# Altium PCB Driver_Board2.28.PcbDoc
Units mil, origin at the board's own origin, x right, y up, seen from the top; angles counter-clockwise.
Board outline 3117.08 x 1370.17 mil, 2 copper layers (Top Layer, Bottom Layer); 45 components, 37 nets, 213 pads, 102 vias.
Unrouted connection lines stored in the file: 17.
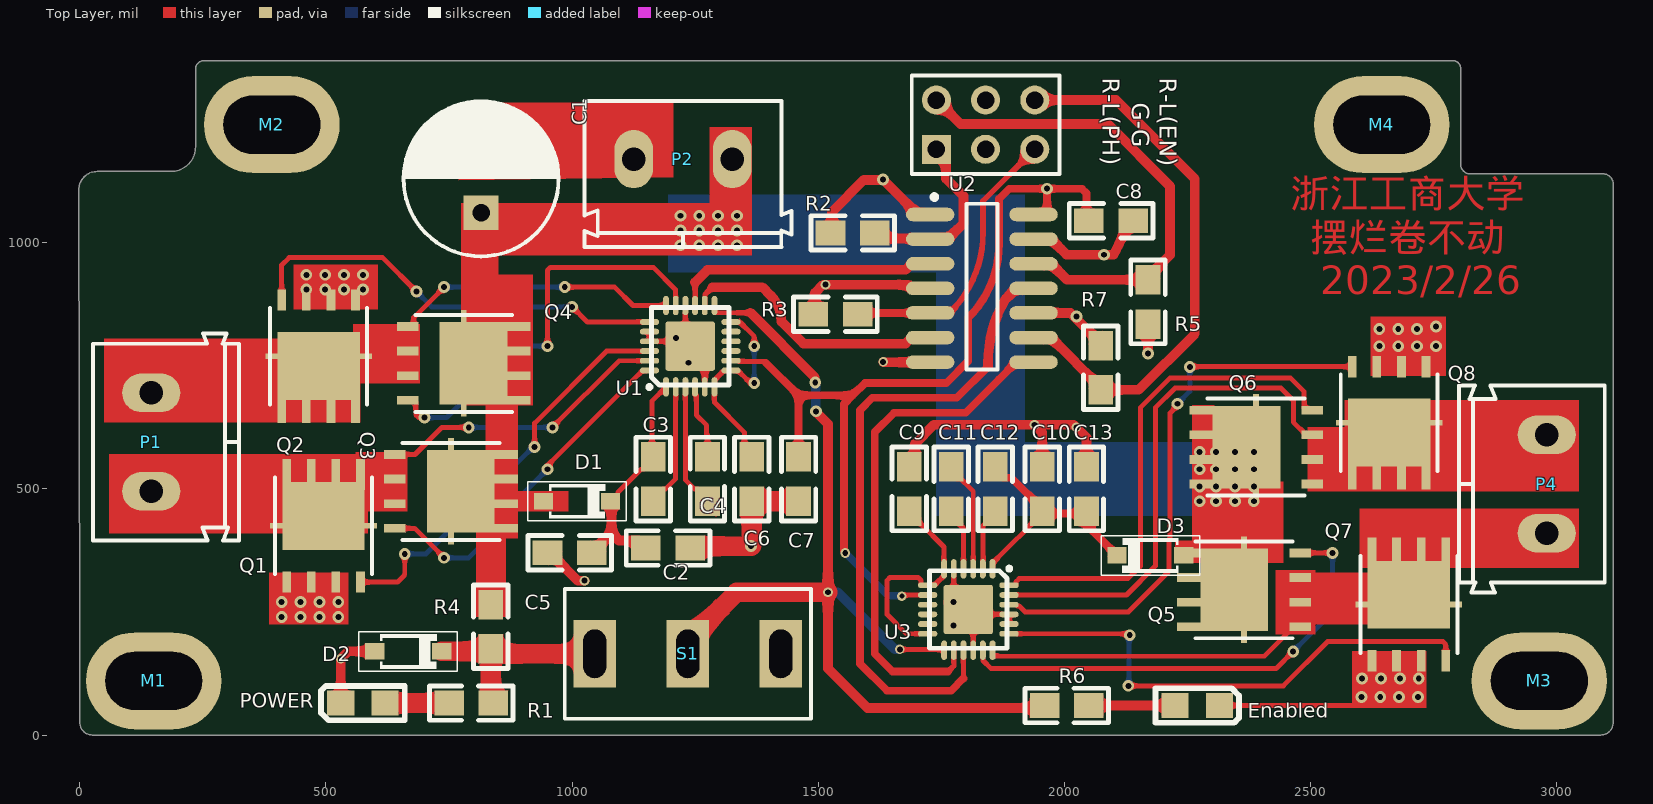
[diagram p0: Top Layer view]
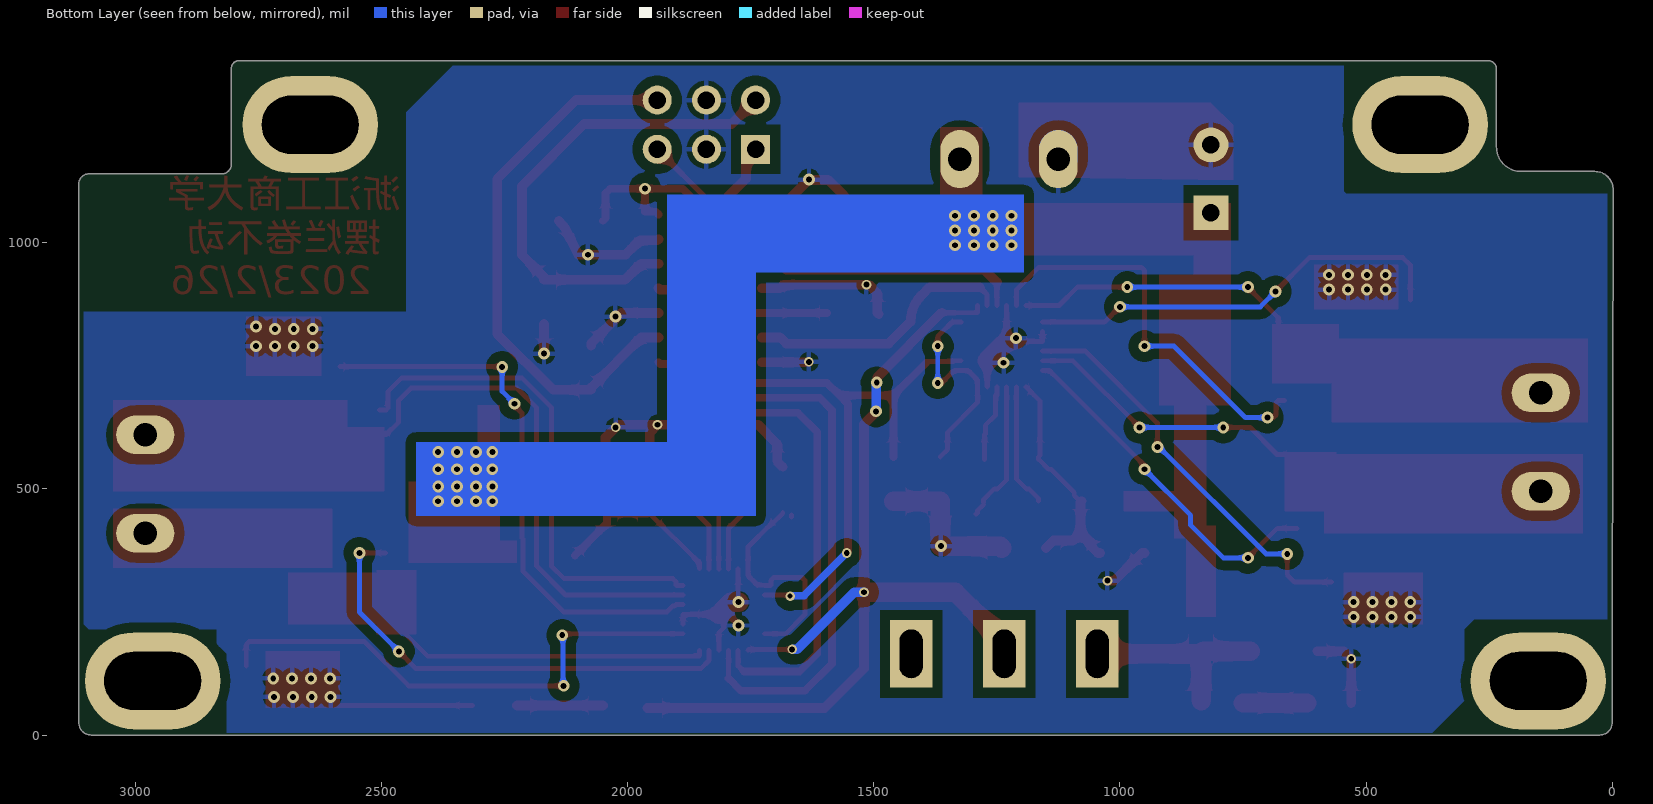
[diagram p1: Bottom Layer view, seen from below]

## Layer stack, top to bottom
Top Solder: solder mask 0.4, Solder Resist, Dk 3.5
Top Layer: signal copper 1.4
Dielectric 1: dielectric 12.6, FR-4, Dk 4.8
Bottom Layer: signal copper 1.4
Bottom Solder: solder mask 0.4, Solder Resist, Dk 3.5

## Board outline
0,25 0,205 -2.08,1107.92 cw(c35,1107.92) 35,1145 185,1145 ccw(c185,1195) 235,1195 235,1355 cw(c252.5,1352.5) 255,1370 2790,1370 cw(c2790,1355) 2805,1355 2805,1160 ccw(c2825,1160) 2825,1140 3095,1140 cw(c3095,1120) 3115,1120 3115,25 cw(c3090,25) 3090,0 25,0 cw(c25,25)

## Design rules (kind name [scope] priority, off if disabled: settings)
Clearance [All] p1: gap=6 ignorepadtopadclearanceinfootprint=TRUE
PolygonConnect [All] p1: connectstyle=Relief reliefconductorwidth=10 reliefentries=4 polygonreliefangle="90 Angle" airgapwidth=10
RoutingVias [All] p1: holewidth=11.81 width=19.68 viastyle="Through Hole" minholewidth=7.87 minwidth=9.84 maxholewidth=19.68 maxwidth=39.37
SolderMaskExpansion [All] p1: expansion=4 istentingtop=FALSE
Width [All] p1: maxlimit=196.85 minlimit=10 preferedwidth=19.68 minimp=50.000000 maximp=50.000000 favimp=50.000000
30 further rules are at their usual default settings.

## Components (designator, comment, footprint, x,y, rotation, side; value= is the part's Value field where it differs from the comment)
C1 "Comment" CAPPR3.5-8X11.5 815,1130 r90 top value=220uF
C2 "Comment" 0805 1150,380 r0 top value=100nF
C3 "Comment" 0805 1165,475 r90 top value=1uF
C4 "Comment" 0805 1275,565 r270 top value=100nF
C5 "Comment" 0805 1040,370 r180 top value=10uF
C6 "Comment" 0805 1365,475 r90 top value=1uF
C7 "Comment" 0805 1460,475 r90 top value=1uF
C8 "Comment" 0805 2140,1045 r180 top value=1uF
C9 "Comment" 0805 1685,545 r270 top value=1uF
C10 "Comment" 0805 1955,455 r90 top value=10uF
C11 "Comment" 0805 1770,455 r90 top value=100nF
C12 "Comment" 0805 1860,455 r90 top value=1uF
C13 "Comment" 0805 2045,455 r90 top value=100nF
D1 "Comment" SOD-123-L 1010,475 r0 top
D2 "Comment" SOD-123-L 667,170 r0 top
D3 "Comment" SOD-123-L 2175,365 r180 top
Enabled "Comment" 0805LED 2225,60 r0 top (schematic designator LED2)
M1 "MountHole" M3-MountSlot 132.83,87.2 r0 top
M2 "MountHole" M3-MountSlot 372.83,1217.2 r0 top
M3 "MountHole" M3-MountSlot 2947.83,87.2 r0 top
M4 "MountHole" M3-MountSlot 2627.83,1217.2 r0 top
P1 "KF/WJ/DG 30x connecter" "KF/WJ/DG 301-2p-5.0mm"#1 145,595 r270 top
P2 "KF/WJ/DG 30x connecter" "KF/WJ/DG 301-2p-5.0mm"#2 1225,1170 r180 top
P3 "Comment" HDR2X3 1740,1190 r0 top
P4 "KF/WJ/DG 30x connecter" "KF/WJ/DG 301-2p-5.0mm"#3 2980,510 r90 top
POWER "Comment" 0805led 620,65 r180 top (schematic designator LED1)
Q1 "Comment" DFN5x6 495,425 r0 top
Q2 "Comment" DFN5x6 485,769.69 r180 top
Q3 "Comment" DFN5x6 754.17,495 r270 top
Q4 "Comment" DFN5x6 780,755 r270 top
Q5 "Comment" DFN5x6 2365,295 r90 top
Q6 "Comment" DFN5x6 2389.68,585 r90 top
Q7 "Comment" DFN5x6 2700,265.32 r0 top
Q8 "Comment" DFN5x6 2660,634.33 r180 top
R1 "Comment" 0805 750,65 r0 top value=1K
R2 "Comment" 0805 1615,1020 r180 top value=10K
R3 "Comment" 0805 1580,855 r180 top value=10K
R4 "Comment" 0805 835,265 r270 top value=2.2K
R5 "Comment" 0805 2170,835 r90 top value=10K
R6 "Comment" 0805 1960,60 r0 top value=330R
R7 "Comment" 0805 2073.8,791.2 r270 top value=10K
S1 "Comment" SS12D10 1235,165 r180 top
U1 "Comment" QFN24-4x4 1240,790 r90 top
U2 "Comment" SOP14 1832.5,882.5 r0 top
U3 "Comment" QFN24-4x4 1805,255 r270 top

## Footprints (in the part's own frame and the unit in brackets; to place one, negate y for a bottom-side part, rotate by r counter-clockwise, add the part's x,y. Pads: shape width x height; smd on the part's side, far side on the other; paste and mask are expansions set on the pad)
0805 [mil]
  rect 60x50 smd: 1(0,0) 2(90,0)
  silkscreen extent -40,-35 130,35
0805LED [mil]
  rect 55x50 smd: A(0,0) C(90,0)
  silkscreen extent -40,-35 130,35
0805led [mil]
  rect 55x50 smd: A(0,0) C(90,0)
  silkscreen extent -40,-35 130,35
CAPPR3.5-8X11.5 [mm]
  rect 1.8x1.8 hole 0.9: 1(-1.75,0)
  round 1.8 hole 0.9: 2(1.75,0)
  silkscreen extent -4,-4.01 4,4, body extent -4,-3.98 4,3.98, height 11.5
DFN5x6 [mm]
  rect 0.45x1.6 smd: 1(-1.905,2.65) 1(-0.635,2.65) 1(0.635,2.65) 1(1.905,2.65)
  rect 5.5x0.3 smd: 1(0,0)
  rect 4.25x3.5 smd: 1(0,0.5)
  rect 0.45x1.1 smd: 2(1.905,-2.9) 3(-1.905,-2.9) 3(-0.635,-2.9) 3(0.635,-2.9)
  silkscreen extent -2.5,-2.5 2.5,2.5, body extent -2.45,-3 2.45,3, height 1
HDR2X3 [mm]
  rect 1.5x1.5 hole 0.9: 1(0,0)
  round 1.5 hole 0.9: 2(0,2.54) 3(2.54,0) 4(2.54,2.54) 5(5.08,0) 6(5.08,2.54)
  silkscreen extent -1.27,-1.27 6.35,3.81, body extent -1.27,-1.27 6.35,3.81, height 8.54
"KF/WJ/DG 301-2p-5.0mm"#1 [mm]
  oval 2x3 hole 1.2: 1(-2.544,0) 2(2.536,0)
  silkscreen extent -5.6,-3 5.08,4.53, body extent -5.6,-3 5,4.6, height 10
"KF/WJ/DG 301-2p-5.0mm"#2 [mm]
  oval 2x3 hole 1.2: 1(2.536,0) 2(-2.544,0)
  silkscreen extent -5.6,-3 5.08,4.53, body extent -5.6,-3 5,4.6, height 10
"KF/WJ/DG 301-2p-5.0mm"#3 [mm]
  oval 2x3 hole 1.2: 1(2.54,0) 2(-2.54,0)
  silkscreen extent -5.6,-3 5.08,4.53, body extent -5.6,-3 5,4.6, height 10
M3-MountSlot [mm]
  oval 7x5 hole 3 slot 5 at 0 deg: 1(0.436,0.579)
QFN24-4x4 [mm]
  rrect10% 2.55x2.55 smd: 0(0,0)
  oval 1x0.3 smd: 1(-2.1,1.25) 2(-2.1,0.75) 3(-2.1,0.25) 4(-2.1,-0.25) 5(-2.1,-0.75) 6(-2.1,-1.25) 13(2.1,-1.25) 14(2.1,-0.75) 15(2.1,-0.25) 16(2.1,0.25) 17(2.1,0.75) 18(2.1,1.25)
  oval 0.3x1 smd: 7(-1.25,-2.1) 8(-0.75,-2.1) 9(-0.25,-2.1) 10(0.25,-2.1) 11(0.75,-2.1) 12(1.25,-2.1) 19(1.25,2.1) 20(0.75,2.1) 21(0.25,2.1) 22(-0.25,2.1) 23(-0.75,2.1) 24(-1.25,2.1)
  silkscreen extent -2.21,-2 2,2.21, body extent -2,-2 2,2, height 0.9
SOD-123-L [mm]
  rect 1x0.85 smd: A(-1.727,0) K(1.727,0)
  silkscreen extent -2.54,-1.02 2.54,1.02, body extent -1.85,-0.8 1.85,0.8, height 1.2
SOP14 [mm] "SOIC, 16-Leads, Body 9.9x3.9mm, Pitch 1.27mm, IPC Low Density"
  oval 2.5x0.7 smd: 1(-2.667,4.445) 2(-2.667,3.175) 3(-2.667,1.905) 4(-2.667,0.635) 5(-2.667,-0.635) 6(-2.667,-1.905) 7(-2.667,-3.175) 8(2.667,-3.175) 9(2.667,-1.905) 10(2.667,-0.635) 11(2.667,0.635) 12(2.667,1.905) 13(2.667,3.175) 14(2.667,4.445)
  silkscreen extent -2.57,-3.56 0.8,5.47, body extent -2,-5 2,5, height 1.75
SS12D10 [mm]
  rect 2.2x3.5 hole 1.2 slot 2.5 at 90 deg mask+0.07: 1(-4.8,0) 2(0,0) 3(4.8,0)
  silkscreen extent -6.35,-3.35 6.35,3.35, body extent -6.4,-3.3 6.35,3.8, height 12.5

## Part data
C1: library part Cap-Elect, "Polarized Capacitor (Radial)", Voltage=25V, Price(RMB)=0.000, Published=8-Jun-2000, Publisher="Altium Limited", Revision="July-2002: Re-released for DXP Platform."
C2 C4 C11 C13: library part Cap-Chip_1, "贴片电容", Tolerance=±10%, Voltage=50V, Price(RMB)=0.000, Published=8-Jun-2000, Publisher="Altium Limited", Revision="July-2002: Re-released for DXP Platform."
C3 C6 C7 C8 C9 C12: library part Cap-Chip_2, "贴片电容", Tolerance=±10%, Voltage=25V, Price(RMB)=0.000, Published=8-Jun-2000, Publisher="Altium Limited", Revision="July-2002: Re-released for DXP Platform."
C5 C10: library part Cap-Chip, "贴片电容", Tolerance=±10%, Voltage=25V, Price(RMB)=0.000, Published=8-Jun-2000, Publisher="Altium Limited", Revision="July-2002: Re-released for DXP Platform."
D1 D3: library part "Diode Schottky", "肖特基二极管 Diode", PartNumber=1N5819, Imax=500mA, Price(RMB)=0.000, Published=8-Jun-2000, Publisher="Altium Limited", Revision="July-2002: Re-released for DXP Platform."
D2: library part "Diode Zen", "3.3V稳压二极管 SOD-123", Price(RMB)=0.000, Published=8-Jun-2000, Publisher="Altium Limited", Revision="July-2002: Re-released for DXP Platform."
Enabled: library part "LED Chip Blue", "Typical Chip LED", Color=Blue, Price(RMB)=0.00, Published=8-Jun-2000, Publisher="Altium Limited", Revision="July-2002: Re-released for DXP Platform."
M1 M2 M3 M4: "固定孔"
P1 P2 P4: library part "KF/WJ/DG 30x", "接线端子 2Pin"
P3: library part "Header 3X2", "Header, 3-Pin, Dual row", LatestRevisionDate=17-Jul-2002, LatestRevisionNote="Re-released for DXP Platform.", Price(RMB)=0.00, Publisher="Altium Limited"
POWER: library part "LED Chip Red", "Typical Chip LED", Price(RMB)=0.00, Published=8-Jun-2000, Publisher="Altium Limited", Revision="July-2002: Re-released for DXP Platform."
Q1 Q2 Q3 Q4 Q5 Q6 Q7 Q8: library part TPH1R403NL, "东芝 N沟 MOS"
R1: library part Res-Chip_2, "贴片电阻", Tolerance=±1%, Price(RMB)=0.000, Published=8-Jun-2000, Publisher="Altium Limited", Revision="July-2002: Re-released for DXP Platform."
R2 R3 R5 R7: library part Res-Chip_1, "贴片电阻", Tolerance=±1%, Price(RMB)=0.000, Published=8-Jun-2000, Publisher="Altium Limited", Revision="July-2002: Re-released for DXP Platform."
R4: library part Res-Chip, "贴片电阻", Tolerance=±1%, Price(RMB)=0.000, Published=8-Jun-2000, Publisher="Altium Limited", Revision="July-2002: Re-released for DXP Platform."
R6: library part Res-Chip_3, "贴片电阻", Tolerance=±1%, Price(RMB)=0.000, Published=8-Jun-2000, Publisher="Altium Limited", Revision="July-2002: Re-released for DXP Platform."
S1: library part SW-SPDT, "单刀双掷开关 3脚船型、钮子、拨动开关 SPDT Subminiature Toggle Switch", Price(RMB)=0.000, Published=24-Mar-1999, Publisher="Altium Limited"
U1 U3: library part DRV8701E, "DRV8701E Ti全桥驱动芯片"
U2: library part SN74HC125PWR, "三态输出的四路缓冲器 TSSOP-20"

## Via types
v1: diameter 24.02, hole 12.01, Top Layer to Bottom Layer, 71 vias
v2: diameter 24, hole 12, Top Layer to Bottom Layer, 21 vias
v3: diameter 19.68, hole 11.81, Top Layer to Bottom Layer, 9 vias
v4: diameter 19.68, hole 9.84, Top Layer to Bottom Layer, 1 vias

## Nets (pads, with @x,y where several pads share a name; then routed paths per layer and width w, separated by ;. In a path a pad name is that pad's centre, name@x,y a point inside that pad or via, vN(x,y) a via of type N, cw(c..) or ccw(c..) an arc to the next point about the centre after c; other vN are vias at no path point)
3V3: D2.K R1.2 R4.2 S1.3 | length 450.8
  Top Layer w20: R4.2@830,170 R4.2 R4.2@835,165 ; R1.2@835,70 R1.2
  Top Layer w39.37: R4.2@835,165 S1.3
  Top Layer w40: D2.K R4.2@830,170 ; R1.2@835,70 R4.2@835,165
  Bottom Layer w40: S1.3@1046.02,139.41 S1.3
DVDD: C7.2 C8.2 U1.8 U2.14 U3.8 | length 1869.3
  Top Layer w9.84: v4(1669.93,282.26) 1672.59,282.26 1674.85,284.53 U3.8
  Top Layer w10: U1.8 1336.95,760.47 1338.37,759.05 1391.09,759.05 1393.59,756.55
  Top Layer w15.75: 1393.59,756.55 1460,690.14 ; C7.2 1460,690.14 ; v3(1555,370) 1555,371.07 1552.5,373.57 1552.5,672.5 1570.14,690.14 ; U2.14 1942.96,1062.96 1965,1062.96 v1(1965,1110) ; C8.2 2045,1050 2045,1100.78 2035.78,1110 v1(1965,1110) ; 1460,690.14 1570.14,690.14 ; 1570.14,690.14 1595,715 1760,715 1805,760 1805,847.68 ccw(c1654.63,998.35) 1867.5,998.35 1867.5,1089.53 1887.97,1110 v1(1965,1110)
  Bottom Layer w15.75: v3(1555,370) 1641.98,283.02 1669.17,283.02 v4(1669.93,282.26)
GND: C1.2 C2.2 C5.2 C6.1 C7.1 C8.1 C9.1 C10.2 C13.2 D2.A Enabled.C P2.1 P3.3 P3.4 POWER.C Q1.3 Q2.3 Q7.3 Q8.3 R2.2 R3.2 R5.1 R7.1 U1.0 U1.5 U1.16 U1.20 U1.21 U2.1 U2.4 U2.7 U2.10 U2.13 U3.0 U3.5 U3.16 U3.20 U3.21 | length 3331.5
  Top Layer w10: U1.20 U1.21 1193,799.84 1202.84,790 U1.0 ; U1.0@1230.16,799.84 U1.16 ; U1.5 U1.0@1269.53,760.47 ; v1(1775,222.5) 1775,225 U3.0 1805,217.84 1814.84,208 U3.16 ; U3.5 1775.47,284.53 U3.0@1790,270 ; U3.0@1814.84,245.16 U3.21 U3.20 ; Enabled.C 2586,60 2621,95 2630,95
  Top Layer w19.68: POWER.C v3(530,155) 545,170 D2.A ; C5.2 955,370 1011.25,313.75 v3(1025.31,313.75) ; R3.2 1493,858 1493,898 1510,915 v3(1515,915) 1682.44,915 1689.94,907.5 U2.4 ; R2.2 1528,1023 1528,1063 1592.51,1127.51 1630.83,1127.51 v1(1631.66,1128.34) 1690.56,1069.44 1690.56,1061.14 1694.2,1057.5 U2.1 ; v3(1631.88,758.12) 1632.5,757.5 U2.7 ; C9.1 1696.19,556.19 1696.19,591.19 1735.39,630.39 v3(1939.38,630.39) ; U2.10 2012.5,857.5 2073.8,796.2 R7.1 ; U2.13 1940.07,1004.93 1975.51,1004.93 2004.6,975.83 2100.23,975.83 2100.51,976.39 2101.66,978.66 2104.26,983.84 2104.88,985.07 2107.78,990.84 2109.9,995.07 2111.25,997.75 2127.07,1029.21 2127.07,1029.84 C8.1 ; C10.2 1955,614.76 v3(1939.38,630.39) ; C13.2 2045,604.53 v3(2024.53,625) 2019.14,630.39 v3(1939.38,630.39) ; v2(2170,775) R5.1
  Top Layer w39.37: C6.1 C7.1
  Top Layer w40: U1.0@1230.16,799.84 U1.0 U1.0@1269.53,760.47 ; C2.2 1243.75,383.75 v1(1363.75,383.75) 1365,385 C6.1 ; v1(1775,270) 1790,270 U3.0 U3.0@1814.84,245.16
  Top Layer w78.74: P2.1 P2.1@1125.17,1189.68
  Bottom Layer w78.74: P2.1 P2.1@1125.17,1189.68
  other v1: 2603.5,77.5 2641.83,77.5 2680.17,77.5 2718.5,77.5 2605,115 2643.33,115 2681.67,115 2720,115 410,240 448.33,240 486.67,240 525,240 410,270 448.33,270 486.67,270 525,270 1236.25,756.25 2640,790 2678.33,790 2716.67,790 2755,790 1211.25,806.25 2640,825 2678.33,825 2716.67,825 2755,830 2025,850 460,905 498.33,905 536.67,905 575,905 460,935 498.33,935 536.67,935 575,935 2080.83,975.83
L_A: P1.2 Q1.1 Q3.3 U1.23 | length 596.2
  Top Layer w10: Q3.3@640,570 680.74,570 735.74,625 v2(790,625) ; v2(960,625) 1095.47,760.47 U1.23
  Bottom Layer w10: v2(790,625) v2(960,625)
L_B: P1.1 Q2.1 Q4.3 U1.18 | length 581.8
  Top Layer w10: Q4.3@665.83,830 674.14,830 678,833.86 678,848 v2(740,910) ; v2(985,910) 1086.41,910 1123.74,872.68 U1.18
  Bottom Layer w10: v2(740,910) v2(985,910)
L_EN: U1.14 U2.6 | length 554.2
  Top Layer w10: U1.14 1269.87,873.02 1269.87,894.87 1285,910
  Top Layer w19.68: 1285,910 1386.32,910 1403.36,892.96 ; 1403.39,892.93 cw(c1351.45,840.86) 1425,840.86 1425,840 1470,795 1677.44,795 1689.94,807.5 U2.6
L_EN_IN: P3.5 R3.1 U2.5 | length 567.1
  Top Layer w11.81: U2.5@1767.5,857.5 ccw(c1604.54,1020.46) 1835,1020.46 1835,1085 P3.5
  Top Layer w15.75: R3.1@1594.43,857.5 U2.5 U2.5@1767.5,857.5
L_PH: U1.15 U2.3 | length 540.4
  Top Layer w10: U1.15 1249.84,919.84
  Top Layer w19.68: 1249.84,919.84 1275,945 1677.44,945 1689.94,957.5 U2.3
L_PH_IN: P3.1 R2.1 U2.2 | length 370.4
  Top Layer w19.68: R2.1 1625.99,1009.01 1764.44,1009.01 1795,1039.57 1795,1095 1759.69,1130.31 1759.69,1170.31 P3.1
NetC2_1: C2.1 C3.2 C5.1 D1.K U1.1 | length 493.5
  Top Layer w10: D1.K 1080.95,475 1092.69,486.73 1092.69,492.69 1140,540 1145,540 1165,560 C3.2 1162.5,567.5 1162.5,679.03 U1.1
  Top Layer w19.68: C5.1 1045,370 1060.16,385.16 1060.16,390.16 1080,410 ; D1.K 1080,473 1080,410 ; C2.1 1134.84,395.16 1094.84,395.16 1080,410
NetC3_1: C3.1 U1.2 | length 254.1
  Top Layer w10: C3.1 1165,480 1185,500 1190,500 1210.47,520.47 U1.2
NetC4_1: C4.1 U1.4 | length 157.7
  Top Layer w10: U1.4 1249.84,693.05 1252.62,690.27 1252.62,649.75 1273.21,629.16 1273.21,611.79 1275,610 C4.1@1275,560
NetC4_2: C4.2 U1.3 | length 283
  Top Layer w10: U1.3 1230.16,518.32 1248.47,500 1255,500 1277.11,477.89 C4.2@1277.11,472.89 ; C4.2@1277.11,467.89 1289.69,455.31 1289.69,451.09 C4.2@1291.99,448.79
NetC6_2: C6.2 U1.6 U1.7 U1.12 | length 441.5
  Top Layer w10: U1.12 1323.02,838.87 1341.14,838.87 1370,810 v2(1370,790) ; C6.2 1350,580 1350,615 1289.21,675.79 1289.21,721 1309,740.79 1336.46,740.79 1359.57,717.68 1367.32,717.68 v2(1370,715)
  Bottom Layer w10: v2(1370,715) v2(1370,790)
NetC9_2: C9.2 U3.6 U3.7 U3.12 | length 470.3
  Top Layer w9.84: U3.7 U3.7@1736,304.21
  Top Layer w10: C9.2@1667.5,442.5 C9.2@1667.5,447.5 ; C9.2@1685,452.5 1685,450 1705,430 1707.5,430 1755.44,382.06 1755.44,338.02 U3.6 1755.79,324 U3.7@1736,304.21 ; U3.12 1679.21,205.79 1640,245 1640,314.14 1645.86,320 1703.05,320 1708.91,314.14 1708.91,305.05 1709.74,304.21 U3.7
NetC10_1: C10.1 C12.2 C13.1 D3.K U3.1 | length 508.3
  Top Layer w9.84: U3.1 1854.21,350.92 1855.12,351.83 1856.83,351.83 1955,450 C10.1
  Top Layer w15.75: C12.2 1860,540 1877.13,522.87 1892.13,522.87 1955,460 C10.1 1960,450 C13.1@2042,450 ; C13.1@2045,452.13 C13.1 2042,452 C13.1@2042,450 ; D3.K 2042,430 C13.1@2042,450
NetC11_1: C11.1 U3.4 | length 117.7
  Top Layer w10: C11.1@1770,445 1795.16,419.84 U3.4
NetC11_2: C11.2 U3.3 | length 226
  Top Layer w10: C11.2 1770,540 1815,495 1815,337.84 U3.3
NetC12_1: C12.1 U3.2 | length 127.9
  Top Layer w10: U3.2 1834.87,338.02 1834.87,424.87 1860,450 C12.1
NetLED1_A: POWER.A R1.1 | length 130
  Top Layer w39.37: POWER.A R1.1
NetLED2_A: Enabled.A R6.2 | length 175
  Top Layer w19.68: R6.2 Enabled.A
NetQ1_2: Q1.2 U1.22 | length 835.5
  Top Layer w10: Q1.2 645.83,310.83 658.18,323.18 658.18,324.39 660,326.21 v2(660,368.11) ; v2(923.75,585) 923.75,633.75 1070.16,780.16 U1.22
  Bottom Layer w10: v2(660,368.11) 703.11,368.11 920,585 v2(923.75,585)
NetQ2_2: Q2.2 U1.19 | length 880.6
  Top Layer w10: Q2.2 410,955 425,970 615,970 v2@685,900 ; v2(1000,870) 1030.79,839.21 U1.19
  Bottom Layer w10: v2(683.69,901.06) 714.75,870 v2(1000,870)
NetQ3_2: Q3.2 U1.24 | length 715.9
  Top Layer w10: Q3.2 680,420 v2(740,360) ; v2(950,540) 952.68,542.68 952.68,549.92 1143.54,740.79 U1.24
  Bottom Layer w10: v2(740,360) 790,360 856.16,426.16 856.16,446.16 v2(950,540)
NetQ4_2: Q4.2 U1.17 | length 841.3
  Top Layer w10: Q4.2 678.62,680 682.48,676.14 682.48,650.86 688.34,645 v2(700,645) ; v2(950,790) 950,944.14 955.86,950 1165,950 1210.13,904.87 1210.13,873.02 U1.17
  Bottom Layer w10: v2(700,645) 745,645 890,790 v2(950,790)
NetQ5_2: Q5.2 U3.17 | length 958.8
  Top Layer w10: U3.17 1834.87,171.98 1834.87,151.33 1851.2,135 2430,135 v1(2465,170) ; Q5.2@2491.88,370 v1(2545,370)
  Bottom Layer w10: v1(2465,170) 2545,250 v1(2545,370)
NetQ6_2: Q6.2 U3.24 | length 1029.7
  Top Layer w10: U3.24 1900.97,304.21 1901.8,305.05 1901.8,311.28 1908.22,317.69 2129.21,317.69 2155,343.48 2155,665.66 2214.34,725 2460,725 2487.2,697.8 2487.2,663.86 2491.06,660 Q6.2
NetQ7_2: Q7.2 U3.19 | length 1078.9
  Top Layer w10: U3.19 2126.21,205.79 2129.11,202.89 v2(2132.89,202.89) ; v2(2130,100) 2445,100 2535,190 2769.14,190 2775,184.14 Q7.2@2775,140.48
  Bottom Layer w10: v2(2130,100) 2131.45,101.45 2131.45,201.45 v2(2132.89,202.89)
NetQ8_2: Q8.2 U3.22 | length 1128.5
  Top Layer w10: U3.22 1901.95,264.84 1904.72,262.06 1908.46,262.06 1920.52,250 2130,250 2212.31,332.31 2212.31,397.87 2215,400.56 2215,654.32 2230,669.32 v2(2230,673.11) ; v2(2255,748) 2255.5,748.5 2544.92,748.5 Q8.2
  Bottom Layer w10: v2(2230,673.11) 2255,698.11 v2(2255,748)
nSLEEP: R6.1 S1.2 U1.13 U3.13 | length 1987
  Top Layer w10: U1.13 1289.21,859.39 1290.05,858.55 1295.42,858.55 1295.98,858 1362,858 ; v3(1665.93,174.07) 1667.78,172.22 v3@1672.78,172.22 ; v3@1670.9,173.74 1754.37,173.74 U3.13
  Top Layer w19.68: S1.2 1235,190.59 S1.2@1268.46,224.06 ; 1362,858 1493.16,726.84 1493.16,716.84 v2(1493.99,716.01) ; v2(1495.41,657.68) 1495.41,656.51 1520,631.93 v3(1520,290)
  Top Layer w20: v3(1520,290) 1520,135 1600,55 R6.1@1960,55
  Top Layer w39.37: S1.2@1268.46,224.06 1334.41,290 v3(1520,290)
  Bottom Layer w10: v3@1663.43,174.07 v3(1665.93,174.07)
  Bottom Layer w19.68: v2(1493.99,716.01) 1494.7,715.3 1494.7,658.39 v2(1495.41,657.68) ; v3(1520,290) 1540,290 1655.93,174.07 v3@1663.43,174.07
R_A: P4.1 Q6.3 Q8.1 U3.23 | length 1043.9
  Top Layer w10: U3.23 2126.22,284.53 2185,343.31 2185,665 2225,705 2440,705 2465.33,679.67 2465.33,635.73 2491.06,610 Q6.3@2503.86,610
R_B: P4.2 Q5.3 Q7.1 U3.18 | length 661.3
  Top Layer w10: U3.18 1854.21,161.49 1855.05,160.65 1865.88,160.65 1866.54,160 2406.38,160 2466.38,220 Q5.3@2479.17,220
R_EN: U2.8 U3.14 | length 1044.1
  Top Layer w10: 1763.88,128.88 1775.47,140.47 U3.14
  Top Layer w15.75: 1763.88,128.88 1651.12,128.88 1615,165 1615,615.78 1654.22,655 1799.57,655 1866.75,722.18 1898.21,753.64 1933.64,753.64 U2.8
R_EN_IN: P3.6 R7.2 U2.9 | length 1127.7
  Top Layer w19.68: U2.9 1972.5,807.5 2073.8,706.2 R7.2 2150.96,701.2 2265,815.24 2265,1130 2105,1290 P3.6
R_PH: U2.11 U3.15 | length 1321.8
  Top Layer w10: 1795,115 1795.08,115.08 1795.08,172.25 U3.15
  Top Layer w15.75: 1795,115 1770,90 1640,90 1585,145 1585,660 1610,685 1781.55,685 1845,748.45
  Top Layer w19.68: 1845,748.45 1845,755.22 1845,755.31 cw(c2103.57,755.31) 1879.71,884.71 1899.93,904.93 1934.93,904.93 U2.11
R_PH_IN: P3.2 R5.2 U2.12 | length 1002.1
  Top Layer w20: P3.2 1788.74,1241.26 2088.74,1241.26 2215,1115 2215,975 2170,930 R5.2 2005.43,925 1972.93,957.5 U2.12
VM: C1.1 D1.A D3.A P2.2 Q3.1 Q4.1 Q5.1 Q6.1 R4.1 | length 218.9
  Top Layer w19.68: Q6.1@2320,515 2350,545 2355,550 2355,560 Q6.1@2370,575 ; Q6.1@2370,585 Q6.1@2370,575 ; Q6.1@2385,480 2385,520.32 Q6.1@2389.68,525 ; Q6.1@2385,525 2385,560 2375,570 Q6.1@2370,575 ; Q6.1@2389.68,560 Q6.1@2389.68,585
  other v1: 2275,475 2308.33,475 2346.67,475 2385,475 2275,505 2308.33,505 2346.67,505 2385,505 2275,540 2308.33,540 2346.67,540 2385,540 2275,575 2308.33,575 2346.67,575 2385,575 1220,995 1258.33,995 1296.67,995 1335,995 1220,1025 1258.33,1025 1296.67,1025 1335,1025 1220,1055 1258.33,1055 1296.67,1055 1335,1055
pads on no net: M1.1 M2.1 M3.1 M4.1 S1.1 U1.9 U1.10 U1.11 U3.9 U3.10 U3.11

## Polygon pours and split planes (outlines as drawn)
GND on Bottom Layer "NONET_L-01_P-001" (solid, pour order 0): 545,1360 2355,1360 2450,1265 2450,860 3105,860 3105,225 3095,215 2835,215 2835,185 2815,165 2815,5 365,5 300,70 300,215 280,235 10,235 10,1100 540,1100 545,1105

## Other copper
Top Layer:
  region net R_B: 2490,330 2690,330 2690,225 2488.82,225 2490,226.18
  region net GND: 2585,170 2735,170 2735,55 2605,55 2585,55
  region net VM: 2260,515 2445,515 2445,370 2260,370
  region net VM: 2260,670 2305,670 2305,505 2260,505
  region net R_A: 2495,625 2630,625 2630,495 2495,495
  region net R_A: 3045,680 3045,495 2570,495 2570,680
  region net GND: 2622.5,730 2622.5,850 2775,850 2775,730
  region net GND: 815,1285 1205,1285 1205,1132.76 770,1127.18 770,1240
  region net L_A: 575,575 652.5,575 652.5,455 560,455 560,575
  region net VM: 865,425 865,240 805,240 805,425
  region net VM: 825,670 890,670 890,590 825,590
  region net VM: 825,680 884.33,680
  region net VM: 775,935 920,935 920,670 775,670
  region net L_B: 690,835 690,715 555,715 555,835
  region net VM: 2445,395 2445,350 2225,350 2225,395
  region net R_B: 2430,205 2430,335 2460,335 2460,205
  region net R_B: 2450,205 2450,335 2510,335 2510,205
  region net VM: 847.5,495 992.5,495 992.5,455 847.5,455
  region net L_A: 665,575 665,455 620,455 620,575
  region net VM: 890,595 890,400 825,400 825,590 830,595
  region net GND: 545,225 385,225 385,330 545,330
  region net L_A: 585,570 585,410 60,410 60,570
  region net L_B: 50,805 570,805 570,635 50,635
  region net VM: 775,1070 850,1070 850,935 775,935
  region net VM: 1280,1235 1365,1235 1365,1075 1280,1075
  region net VM: 775,1080 1365,1080 1365,975 775,975
  region net GND: 435,955 605,955 605,865 435,865
  region net R_B: 2600,460 3045,460 3045,400 2600,400
  region net R_B: 3045,435 3045,340 2600,340 2600,435
  text "浙江工商大学" at 2460,1053.43 h98.43
  text "摆烂卷不动" at 2500.06,963.79 h98.43
  text "2023/2/26" at 2520,876.05 h98.43
Bottom Layer:
  region net VM: 1195,1097.44 1920,1097.44 1920,940 1195,940
  region net VM: 1740,1010 1920,1010 1920,595 2430,595 2430,445 1740,445

## Silkscreen, mask and mechanical layers (free items; w line width, h text height)
Top Overlay:
  text "R-L(PH)" at 2066.29,1335 h60 r270
  text "R-L(EN)" at 2181.29,1335 h60 r270
  text "G-G" at 2125.64,1285 h60 r270
Mechanical 1:
  the board outline again, w10